# Altium PCB DPPXHK.PcbDoc (part 2 of 3)
Units mm, origin at the board's own origin, x right, y up, seen from the top; angles counter-clockwise.
Board outline 90 x 49 mm, 4 copper layers (Top Layer, ground_plane, source, Bottom Layer), stack 0.778 mm thick; 169 components, 237 nets, 996 pads, 341 vias.
Unrouted connection lines stored in the file: 220.
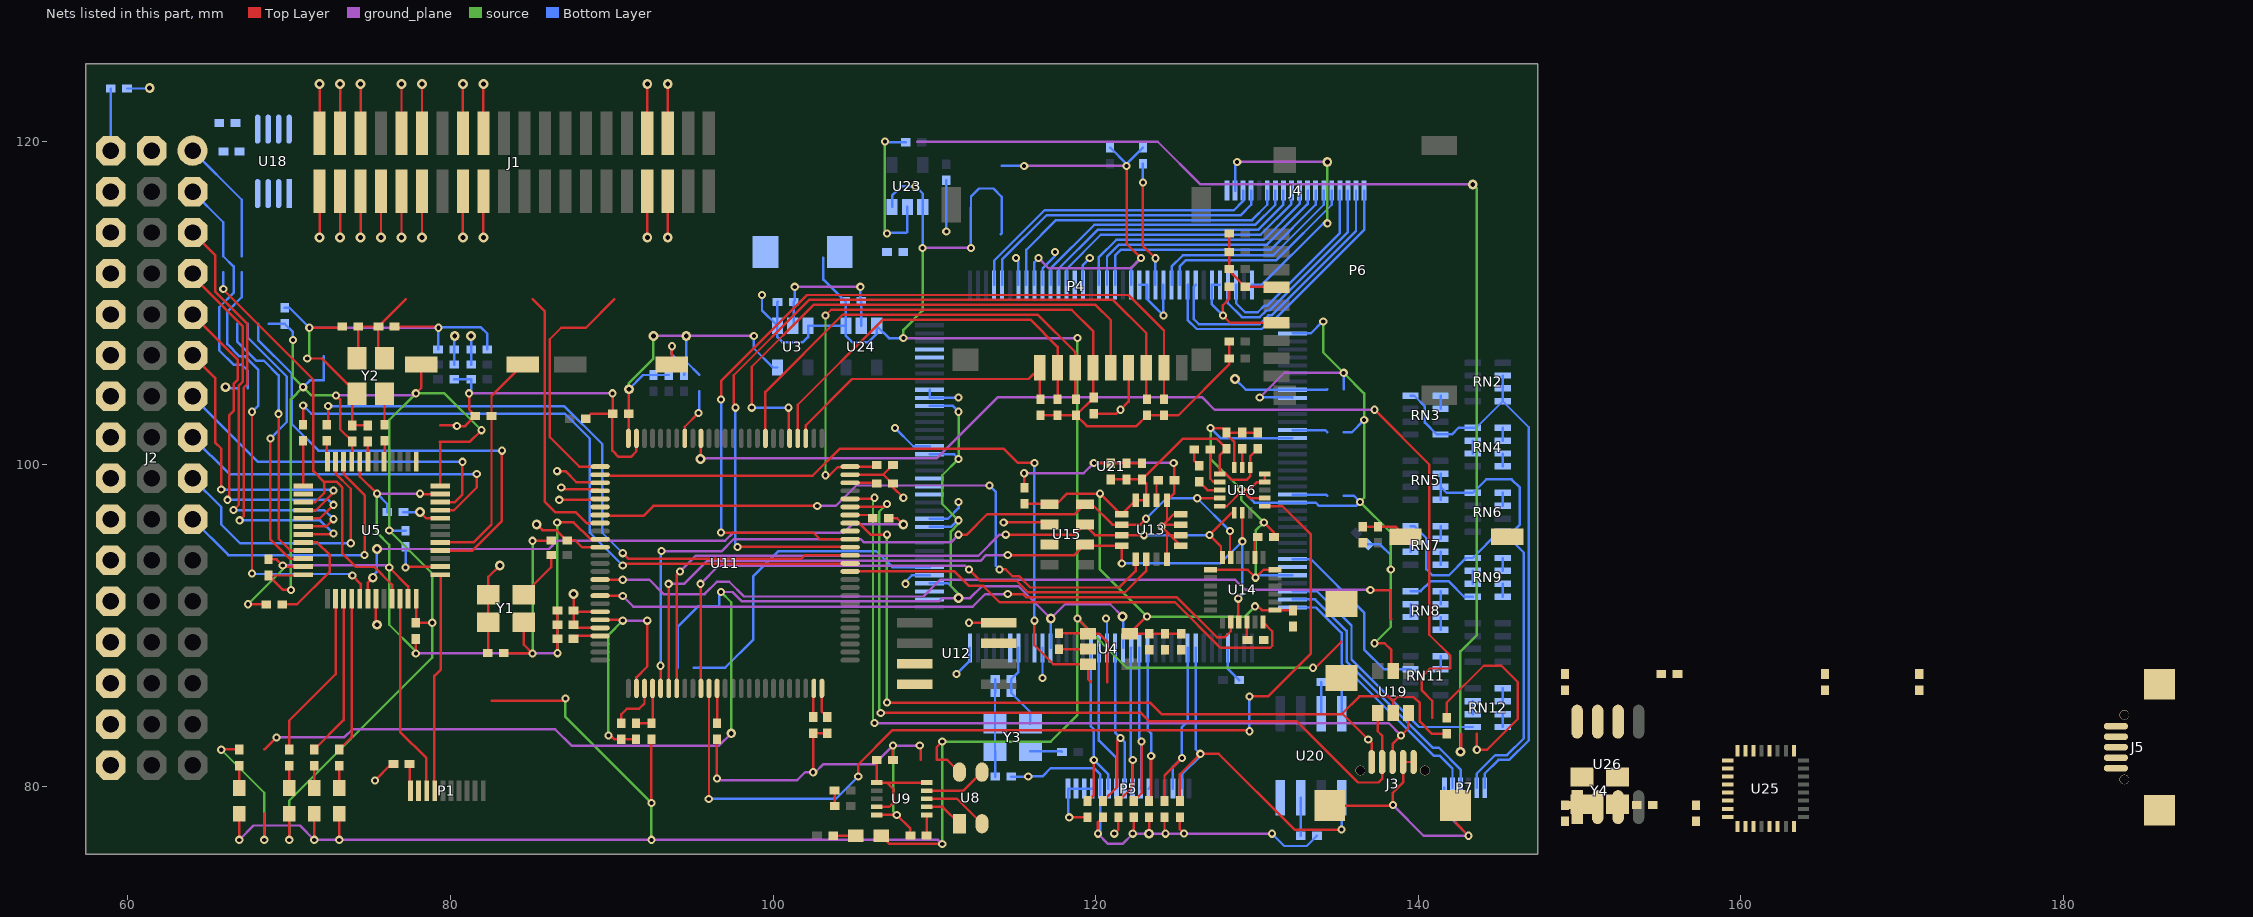
[diagram p4: the nets of this part, all layers, seen from the top]

## Via types
v1: diameter 0.508, hole 0.254, Top Layer to Bottom Layer, 256 vias
v2: diameter 0.61, hole 0.305, Top Layer to Bottom Layer, 81 vias
v3: diameter 1, hole 1, Top Layer to Bottom Layer, 4 vias

## Nets (pads, with @x,y where several pads share a name; then routed paths per layer and width w, separated by ;. In a path a pad name is that pad's centre, name@x,y a point inside that pad or via, vN(x,y) a via of type N, cw(c..) or ccw(c..) an arc to the next point about the centre after c; other vN are vias at no path point) (continued)
GND: C5.2 C6.1 C7.1 C8.2 C9.1 C10.1 C13.2 C14.2 C16.2 C17.2 C18.1 C26.1 C30.2 C31.2 C32.2 C33.2 C34.2 C35.2 C36.2 C37.1 C38.1 C39.1 C40.1 C41.2 C42.2 C43.1 C44.1 C45.2 C46.1 C48.1 C49.1 C50.1 C51.1 C52.1 C53.1 C54.1 C55.1 C56.1 C57.1 C58.1 C60.1 C64.2 C65.1 C66.1 C67.2 C71.2 C72.1 C73.1 C74.2 C75.1 C76.1 C77.1 C78.1 C79.2 J1.33 J1.34 J1.35 J2.3 J2.6 J2.9 J2.12 J2.15 J2.18 J2.21 J2.24 J2.27 J2.30 J2.33 J2.36 J2.39 J2.42 J2.45 J2.48 J3.4 J3.5 J3.6 J3.7 J3.8 J3.9 J4.2 J5.5 J5.6 J5.7 J5.8 J5.9 K1.2 P1.2 P4.6 P5.13 P5.14 P5.15 P5.16 P6.6 P7.6 R5.1 R6.1 R14.2 R18.1 R19.1 R22.1 R23.1 R35.1 R36.1 R40.1 R41.1 R68.1 R70.1 Rs1.1 S2.2 U3.2 U4.2 U5.8 U5.23 U5.35 U5.47 U9.5 U11.10 U11.20 U11.27 U11.74 U11.99 U12.4 U13.8 U13.9 U13.10 U13.11 U13.12 U13.13 U14.1 U14.18 U15.2 U15.3 U16.5 U16.10 U16.12 U16.13 U16.16 U18.1 U18.4 U18.7 U19.2 U20.4 U21.4 U21.19 U21.27 U21.30 U21.36 U21.41 U21.48 U21.57 U21.63 U21.64 U21.79 U21.82 U21.86 U21.87 U21.94 U21.95 U21.97 U21.103 U21.104 U21.108 U21.110 U21.118 U21.123 U21.131 U21.140 U23.2 U24.2 U25.1 U25.2 U25.9 U26.3 Y1.2 Y2.2 Y3.2 Y4.2 | length 438.6
  Top Layer w0.152: v1(65.786,82.296) 65.801,82.311 R22.1@66.903,82.311 ; v1(67.437,91.313) R18.1@68.58,91.313 ; v1(68.453,76.708) 68.453,78.321 ; C17.2@68.707,94.099 69.223,94.099 v1(69.596,93.726) 69.675,93.647 U5.23@70.875,93.647 ; v1(71.12,106.553) 72.032,106.553 Y2.2@74.207,104.378 73.914,104.085 C13.2@73.914,102.403 C18.1@74.867,102.403 ; v1(71.247,108.458) 73.112,108.458 73.239,108.585 C5.2@73.287,108.537 ; U5.8@74.375,100.147 74.375,99.234 v1(75.438,98.171) ; v1(75.311,80.391) 75.311,80.394 76.326,81.408 C34.2@76.462,81.408 ; v1(76.2,93.599) 77.375,92.424 U5.35@77.375,91.647 ; C35.2@76.531,108.537 79.169,108.537 v1(79.248,108.458) ; v1(77.851,88.265) 77.851,88.908 77.978,89.035 C14.2@77.851,89.162 ; v1(78.105,98.171) 78.129,98.147 U5.47@79.375,98.147 ; 79.375,102.403 80.35,102.403 v1(80.391,102.362) 80.907,102.362 R5.1@81.542,102.997 81.153,103.386 v1(81.153,104.394) ; C38.1@83.304,88.3 83.339,88.265 v1(85.09,88.265) 84.539,88.816 Y1.2@84.539,90.209 ; v1(85.09,95.25) 86.221,95.25 C7.1@86.241,95.27 ; v1(86.614,96.393) 87.63,96.393 88.673,95.35 U11.10@89.278,95.35 ; v1(86.63,88.281) C39.1@86.63,89.177 C32.2@86.63,90.043 C40.1@86.63,90.932 ; C44.1@88.384,102.811 88.697,103.124 C43.1@90.051,103.124 ; U11.20@89.278,90.35 90.625,90.35 v1(90.678,90.297) ; v1(89.789,83.185) 89.916,83.185 90.162,82.939 C33.2@90.594,82.939 R14.2@91.503,82.939 ; v1(90.043,104.394) 90.051,104.386 C43.1@90.051,103.124 ; U11.27@91.528,86.1 91.528,86.782 92.202,87.456 v1(92.202,90.297) ; U11.99@91.528,101.6 91.528,100.799 91.186,100.457 90.424,100.457 90.043,100.838 90.043,103.116 C43.1@90.051,103.124 ; v2(92.202,114.046) J1.33@92.202,116.923 ; J1.34@92.202,120.523 v2(92.202,123.571) ; v2(93.472,114.046) J1.35@93.472,116.923 ; S2.2@93.726,106.172 v1(93.726,107.315) ; v1(96.52,80.518) R35.1@96.52,82.947 ; v1(102.489,80.899) C42.2@102.489,83.32 C37.1@103.355,83.32 ; U11.74@104.778,99.35 106.835,99.35 ; U9.5@106.426,78.256 v1(107.672,78.256) 108.518,77.41 R23.1@108.518,76.97 ; C36.2@107.434,81.661 107.434,82.542 v1(107.442,82.55) ; C31.2@107.434,99.949 106.835,99.35 ; v1(108.077,97.917) 107.434,98.56 C41.2@107.434,98.806 107.379,98.806 106.835,99.35 ; v1(109.093,82.55) 109.151,82.492 109.151,81.661 ; v1(112.141,90.17) U12.4@113.979,90.17 ; v1(114.3,96.393) 117.009,96.393 U15.2@117.136,96.266 ; v1(115.57,99.441) 115.57,98.562 C50.1@115.588,98.544 ; C9.1@117.729,88.527 119.51,88.527 U4.2@119.528,88.545 ; v1(118.364,78.105) R70.1@119.507,78.105 ; v1(119.888,100.076) 119.908,100.056 C58.1@120.94,100.056 C56.1@121.907,100.056 C55.1@122.875,100.056 ; C30.2@119.888,103.132 121.293,103.132 v1(121.539,103.378) 122.041,103.88 P4.6@122.041,105.978 ; v1(121.158,77.089) 121.412,77.343 R68.1@121.412,78.113 ; U13.8@124.426,94.103 124.426,95.792 ; v1(124.841,100.076) 124.887,100.03 C52.1@124.887,99.011 124.887,98.219 U13.13@124.426,97.758 124.426,96.486 ; U13.9@125.276,94.953 125.265,94.953 124.615,95.603 ; U13.10@125.276,95.603 124.615,95.603 ; U13.11@125.276,96.253 v1@124.193,96.253 ; U13.12@125.276,96.903 124.843,96.903 124.426,96.486 ; U14.1@127.127,93.456 129.429,93.456 v1(129.921,92.964) 130.413,93.456 U14.18@131.127,93.456 ; v1(127.127,102.235) 127.848,102.235 C54.1@128.122,101.961 ; U16.5@127.692,97.393 128.127,97.393 129.032,98.298 v1(129.032,98.425) ; C26.1@128.278,110.998 128.278,110.244 127.889,109.855 v1(127.889,109.22) 128.345,108.764 P6.6@131.221,108.764 ; U16.16@128.592,99.793 128.605,99.806 128.605,101.369 128.122,101.853 C54.1@128.122,101.961 ; C57.1@130.056,101.961 C60.1@129.089,101.961 C54.1@128.122,101.961 ; v1(130.429,96.393) 131.056,95.766 C51.1@131.056,95.487 ; U16.10@130.492,97.893 129.564,97.893 v1(129.032,98.425) ; U16.13@130.492,99.393 U16.12@130.492,98.893 130.008,98.893 129.54,98.425 v1(129.032,98.425) ; J3.6@134.515,78.834 138.397,78.834 v1(138.43,78.867) 138.43,79.629 139.065,80.264 J3.4@139.065,81.534 J3.5@139.715,81.534 ; v1(137.287,88.9) 137.916,88.9 138.338,88.478 138.338,87.28 U19.2@138.446,87.172 ; C64.2@141.774,84.279 141.774,85.213 144.064,87.503 145.161,87.503 146.177,86.487 146.177,84.201 144.273,82.297 v1(143.637,82.296) 143.636,83.279 ; J3.7@142.315,78.834 142.315,77.776 v1(143.129,76.962) ; v1@124.193,96.253 v1(124.079,96.139) 124.426,95.792 ; v1@124.193,96.253 124.426,96.486 ; 124.426,95.792 124.615,95.603
  ground_plane w0.152: v1(69.596,93.726) 76.073,93.726 v1(76.2,93.599) ; v1(71.247,108.458) v1(79.248,108.458) ; v1(75.438,98.171) v1(78.105,98.171) ; v1(77.851,88.265) v1(85.09,88.265) 85.106,88.281 v1(86.63,88.281) ; v1(81.153,104.394) v1(90.043,104.394) ; v1(90.678,90.297) v1(92.202,90.297) ; v1(96.52,80.518) 96.622,80.416 101.498,80.416 101.981,80.899 v1(102.489,80.899) 102.616,80.899 103.124,81.407 106.299,81.407 v1(107.442,82.55) v1(109.093,82.55) ; v1(101.346,110.998) v1(105.41,110.998) ; v1@106.934,114.427 v1(107.061,114.3) ; v1(115.57,99.441) 119.253,99.441 v1(119.888,100.076) v1(124.841,100.076) ; v1(128.778,118.745) v2(134.366,118.745) ; v1(130.175,104.14) 131.699,105.664 v1(135.382,105.664) ; v1(138.43,78.867) 140.335,76.962 v1(143.129,76.962)
  source w0.152: v1(65.786,82.296) 68.453,79.629 v1(68.453,76.708) ; v1(67.437,91.313) 69.596,93.472 v1(69.596,93.726) ; v1(71.12,106.553) 71.247,106.68 v1(71.247,108.458) ; v1(75.438,98.171) 75.438,95.758 76.2,94.996 v1(76.2,93.599) 76.2,90.043 77.851,88.392 v1(77.851,88.265) ; v1(85.09,88.265) v1(85.09,95.25) ; v1(86.614,96.393) 86.63,96.377 v1(86.63,88.281) ; v1(89.789,83.185) 89.789,89.408 v1(90.678,90.297) ; v1@106.934,114.427 v1(106.934,120.015) ; v1(107.442,82.55) 107.442,78.486 v1(107.672,78.256) ; v1(127.127,102.235) 127.127,100.33 v1(129.032,98.425) 129.032,97.79 v1(130.429,96.393) 129.921,95.885 v1(129.921,92.964) ; v1(134.112,108.839) 134.112,106.934 v1(135.382,105.664) 136.652,104.394 v1(136.652,102.743) 136.652,97.917 v1(136.398,97.663) 138.303,95.758 v1(138.303,93.472) 138.303,89.916 v1(137.287,88.9) ; v1(134.366,114.935) v2(134.366,118.745)
  Bottom Layer w0.152: J2.3@58.928,119.443 58.944,119.459 58.944,122.428 C6.1@58.944,123.294 ; v2(66.04,104.775) 66.103,104.712 66.787,104.712 ; C16.2@69.723,109.698 70.007,109.698 v1(71.247,108.458) ; v1(75.438,98.171) 76.081,97.528 R19.1@76.081,97.028 ; R41.1@79.227,107.125 79.248,107.145 v1(79.248,108.458) 79.273,108.483 81.89,108.483 82.288,108.085 R40.1@82.288,107.125 ; C48.1@80.227,105.263 C46.1@81.288,105.263 81.288,104.529 v1(81.153,104.394) ; v1(93.726,107.315) 93.726,106.807 94.485,106.048 R36.1@94.485,105.529 ; U3.2@101.219,108.585 101.277,108.643 C72.1@101.277,110.059 101.346,110.128 v1(101.346,110.998) ; v1(105.41,110.998) 105.41,110.162 C75.1@105.463,110.109 105.463,108.593 U24.2@105.471,108.585 ; v1(106.934,120.015) 106.982,119.967 C73.1@108.225,119.967 ; v1(107.061,114.3) 107.111,114.35 108.273,114.35 108.331,114.408 U23.2@108.331,115.951 ; v1(107.569,102.235) 108.689,101.115 U21.57@109.707,101.115 ; v1(108.204,92.583) 108.204,92.71 108.609,93.115 U21.41@109.707,93.115 ; U21.48@109.707,96.615 110.842,96.615 111.506,97.279 v1(111.506,97.663) ; U21.64@109.707,104.615 U21.63@109.707,104.115 111.481,104.115 v1(111.506,104.14) ; v1(110.744,114.427) C71.2@110.744,117.602 ; v1(111.379,86.995) 112.207,87.823 U21.36@112.207,88.615 ; v1(115.062,112.776) 115.207,112.631 U21.79@115.207,111.115 ; U21.30@115.207,88.615 115.207,87.118 C65.1@114.768,86.679 C66.1@114.768,85.813 115.96,84.621 Y3.2@115.96,83.904 ; U21.27@116.707,88.615 116.707,86.747 v1(116.713,86.741) ; U21.82@116.707,111.115 116.707,112.135 117.475,112.903 v1(117.475,113.157) ; v1(118.364,78.105) 118.293,78.176 P5.16@118.293,79.883 P5.15@118.793,79.883 P5.14@119.293,79.883 P5.13@119.793,79.883 ; U21.86@118.707,111.115 U21.87@119.207,111.115 119.207,112.349 v1(119.634,112.776) ; v1(120.65,90.424) 120.707,90.367 U21.19@120.707,88.615 ; U21.94@122.707,111.115 U21.95@123.207,111.115 123.207,110.219 v1(124.206,109.22) v1(124.206,109.22) U21.97@124.207,111.115 ; v1(127.127,102.235) 127.747,101.615 U21.123@132.207,101.615 ; U21.104@127.707,111.115 U21.103@127.207,111.115 127.207,109.902 v1(127.889,109.22) ; U21.4@128.207,88.615 128.207,87.304 C76.1@128.897,86.614 ; J4.2@128.644,116.967 128.644,118.611 v1(128.778,118.745) ; v1(129.032,98.425) 129.842,97.615 U21.131@132.207,97.615 133.652,97.615 133.858,97.409 136.144,97.409 v1(136.398,97.663) 136.017,98.044 135.374,98.044 ; U21.108@129.707,111.115 130.292,111.115 134.112,114.935 v1(134.366,114.935) ; v1(129.921,92.964) 130.072,93.115 U21.140@132.207,93.115 ; v1(130.175,104.14) 132.182,104.14 U21.118@132.207,104.115 ; U21.110@132.207,108.115 133.342,108.115 134.066,108.839 v1(134.112,108.839) ; 135.374,101.981 135.89,101.981 v1(136.652,102.743) ; 135.374,104.648 135.374,105.656 v1(135.382,105.664) ; C74.2@136.879,95.023 137.641,95.023 138.303,94.361 v1(138.303,93.472) ; P7.6@141.629,79.935 141.629,78.462 v1(143.129,76.962)
GPIO_EXT_1: J1.7 U11.8 | length 19.7
  Top Layer w0.152: v2(75.692,114.046) J1.7@75.692,116.923 ; 85.09,110.236 85.852,109.474 85.852,97.663 86.487,97.028 87.757,97.028 88.435,96.35 U11.8@89.278,96.35
GREEN: P7.2 RN5.2 RN5.3 RN5.4 RN6.4 RN6.8 RN7.8 RN9.8 | length 37.8
  Bottom Layer w0.152: RN7.8@139.534,96.165 139.757,96.165 140.503,95.419 140.503,93.498 140.884,93.117 141.9,93.117 142.967,94.184 RN9.8@143.383,94.184 RN6.4@145.022,95.823 ; RN5.4@141.392,97.804 RN5.3@141.392,98.604 ; RN5.2@141.392,99.404 RN5.3@141.392,98.604 ; P7.2@143.629,79.935 143.629,80.817 144.777,81.966 145.516,81.966 146.548,82.998 146.548,94.515 RN6.4@145.241,95.823 145.861,95.823 146.304,96.266 146.304,98.552 145.796,99.06 144.22,99.06 RN6.8@143.383,98.223 141.773,98.223 RN5.3@141.392,98.604
GYRO_CS: U11.7 U13.5 U21.28 | length 40.4
  Top Layer w0.152: U11.7@89.278,96.85 89.329,96.799 91.973,96.799 92.583,97.409 v1(102.743,97.409) ; v1(114.046,93.472) 114.427,93.472 114.833,93.066 115.238,93.066 115.949,92.354 121.46,92.354 122.476,93.371 U13.5@122.476,94.103
  ground_plane w0.152: v1(102.743,97.409) 103.886,97.409 105.156,98.679 v1(113.411,98.679)
  Bottom Layer w0.152: v1(113.411,98.679) 113.817,98.273 113.817,93.701 v1(114.046,93.472)
GYRO_DRDY: U11.35 U13.6 U21.31 | length 36.5
  Top Layer w0.152: U11.35@95.528,86.1 v1@95.528,92.559 ; v1(112.141,93.472) 112.852,92.761 115.111,92.761 115.823,92.05 121.805,92.05 123.126,93.371 U13.6@123.126,94.103
  ground_plane w0.152: v1(95.504,92.583) 96.622,93.701 111.912,93.701 v1(112.141,93.472)
IO_BOOT0: R19.2 U5.44 | length 2.5
  Top Layer w0.152: v2(78.105,97.028) 78.486,96.647 U5.44@79.375,96.647
  Bottom Layer w0.152: R19.2@77.081,97.028 v2(78.105,97.028)
IO_CH1: J2.28 U5.10 | length 17.9
  Top Layer w0.152: U5.10@73.375,100.147 73.375,99.382 74.676,98.081 v1(74.676,94.361)
  Bottom Layer w0.152: J2.28@64.008,96.583 66.23,94.361 v1(74.676,94.361)
IO_CH2: J2.25 U5.11 | length 17.5
  Top Layer w0.152: U5.11@72.875,100.147 72.875,99.417 73.812,98.479 v1(73.812,95.098)
  Bottom Layer w0.152: J2.25@64.008,99.123 65.786,97.345 65.786,96.266 66.954,95.098 v1(73.812,95.098)
IO_CH3: J2.22 U5.45 | length 22.2
  Top Layer w0.152: U5.45@79.375,97.147 80.209,97.147 81.627,98.566 v1(81.627,99.385)
  Bottom Layer w0.152: J2.22@64.008,101.663 66.286,99.385 v1(81.627,99.385)
IO_CH4: J2.19 U5.46 | length 22
  Top Layer w0.152: U5.46@79.375,97.647 80.27,97.647 80.738,98.115 v1(80.738,100.147)
  Bottom Layer w0.152: J2.19@64.008,104.203 68.064,100.147 v1(80.738,100.147)
IO_CH5: J2.16 U5.16 | length 18.5
  Top Layer w0.152: J2.16@64.008,106.743 65.405,105.346 65.405,101.346 65.786,100.965 v1(65.786,98.425) ; U5.16@70.875,97.147 71.65,97.147 72.737,98.234 v1(72.737,98.369)
  Bottom Layer w0.152: v1(65.786,98.425) 72.681,98.425 v1(72.737,98.369)
IO_CH6: J2.13 U5.17 | length 21.8
  Top Layer w0.152: J2.13@64.008,109.283 66.802,106.489 66.802,105.225 66.573,104.996 66.573,103.327 66.269,103.022 66.269,97.892 v1(66.167,97.79) ; U5.17@70.875,96.647 71.904,96.647 v1(72.737,97.48)
  Bottom Layer w0.152: v1(66.167,97.79) 72.427,97.79 v1(72.737,97.48)
IO_CH7: J2.10 U5.18 | length 24.7
  Top Layer w0.152: J2.10@64.008,111.823 64.008,111.662 67.107,108.564 67.107,105.098 66.878,104.87 66.878,97.485 v1(66.548,97.155) ; U5.18@70.875,96.147 72.293,96.147 v1(72.737,96.591)
  Bottom Layer w0.152: v1(66.548,97.155) 72.173,97.155 v1(72.737,96.591)
IO_CH8: J2.7 U5.19 | length 27.5
  Top Layer w0.152: J2.7@64.008,114.363 65.405,112.966 65.405,110.697 67.412,108.69 67.412,104.972 67.183,104.743 67.183,96.774 v1(66.929,96.52) ; U5.19@70.875,95.647 72.682,95.647 v1(72.737,95.702)
  Bottom Layer w0.152: v1(66.929,96.52) 71.919,96.52 v1(72.737,95.702)
IO_CLK_24M: R34.2 U5.5 | length 1.3
  Top Layer w0.152: U5.5@75.875,100.147 75.915,100.187 R34.2@75.915,101.451
IO_LED_AMBER: R24.1 U5.28 | length 9.7
  Top Layer w0.152: R24.1@73.102,82.311 73.849,83.058 73.875,83.058 U5.28@73.875,91.647
IO_LED_BLUE: R25.1 U5.27 | length 10.1
  Top Layer w0.152: R25.1@71.552,82.311 73.375,84.134 U5.27@73.375,91.647
IO_LED_SAFETY: R8.1 U5.26 | length 10.5
  Top Layer w0.152: R8.1@70.003,82.311 70.003,84.1 72.875,86.972 U5.26@72.875,91.647
IO_RESET: C18.2 U5.7 | length 1.3
  Top Layer w0.152: C18.2@74.867,101.403 74.867,100.155 U5.7@74.875,100.147
IO_SWCLK: P1.4 U5.37 | length 13.6
  Top Layer w0.152: P1.4@79.002,79.756 79.002,86.876 79.4,87.274 79.4,93.122 U5.37@79.375,93.147
IO_SWDIO: P1.3 U5.34 | length 12.6
  Top Layer w0.152: U5.34@76.875,91.647 76.875,83.399 78.502,81.772 P1.3@78.502,79.756
IO_USART1_RX: J1.16 U5.31 | length 4.7
  Top Layer w0.152: U5.31@75.375,91.647 75.375,90.106 v2(75.438,90.043) ; J1.16@80.772,120.523 v2(80.772,123.571)
IO_USART1_TX: J1.15 R31.1 U5.30 | length 40.5
  Top Layer w0.152: U5.30@74.875,91.647 74.875,92.655 v2(75.184,92.964) ; v2(80.772,114.046) J1.15@80.772,116.923 ; R31.1@107.18,96.647 107.696,96.647 v2(108.077,96.266)
  ground_plane w0.152: v2(75.438,94.742) 86.106,94.742 86.614,95.25 97.028,95.25 97.536,95.758 104.394,95.758 104.902,96.266 v2(108.077,96.266)
  Bottom Layer w0.152: v2(75.184,92.964) 75.184,93.091 75.438,93.345 v2(75.438,94.742)
IO_VDD_3V3: C5.1 C7.2 C13.1 C14.1 C16.1 C17.1 C26.2 C30.1 C31.1 C32.1 C33.1 C34.1 C35.1 C36.1 C37.2 C38.2 C39.2 C40.2 C43.2 DS1.1 J1.1 J1.2 J1.9 J4.1 L2.2 P1.1 P4.4 P5.12 P6.4 R3.1 R4.1 R17.2 R50.2 R51.2 R52.2 R53.2 R54.2 R55.2 R56.2 R57.2 R58.1 R62.1 R64.1 R65.1 R66.1 R67.1 R69.1 R71.1 R72.1 R74.2 R75.2 R76.2 R77.2 R78.2 S1.2 U3.5 U5.1 U5.9 U5.24 U5.36 U5.48 U9.1 U9.4 U9.10 U11.6 U11.11 U11.19 U11.21 U11.22 U11.28 U11.50 U11.75 U11.100 U12.3 U12.7 U12.8 U18.8 U20.8 U21.17 U21.26 U21.40 U21.47 U21.56 U21.62 U21.81 U21.93 U21.117 U21.122 U21.130 U21.139 U26.7 Y1.1 Y1.4 Y2.1 Y2.4 | length 382
  Top Layer w0.152: 68.453,82.311 68.468,82.311 v1(69.215,83.058) ; v1(70.003,76.708) DS1.1@70.003,78.321 ; v1(70.104,92.202) 69.604,92.202 C17.1@68.707,93.099 70.827,93.099 U5.24@70.875,93.147 ; v2(71.882,114.046) J1.1@71.882,116.923 ; J1.2@71.882,120.523 v2(71.882,123.571) ; v1(72.898,104.267) 73.152,104.013 73.152,102.165 C13.1@73.914,101.403 73.914,100.236 73.825,100.147 U5.9@73.875,100.147 ; Y2.1@74.207,106.578 74.287,106.658 C5.1@74.287,108.537 75.451,108.537 C35.1@75.531,108.458 ; Y2.4@75.907,106.578 75.531,106.954 C35.1@75.531,108.458 ; v2(76.962,114.046) J1.9@76.962,116.923 ; 77.229,110.236 C35.1@75.531,108.537 C35.1@75.531,108.458 ; C34.1@77.462,81.408 77.462,79.796 P1.1@77.502,79.756 ; v1(77.851,104.394) 78.186,104.729 S1.2@78.186,106.172 ; U5.36@77.875,91.647 77.875,90.186 C14.1@77.851,90.162 78.859,90.162 v1(78.867,90.17) ; 79.318,101.403 79.375,101.403 ; U5.48@79.375,98.647 79.375,101.403 ; v1(81.915,102.108) 81.21,101.403 79.375,101.403 ; C38.2@82.304,88.3 82.339,88.335 Y1.1@82.339,90.209 Y1.4@82.339,91.909 82.339,93.007 v2(83.058,93.726) ; v2(85.344,96.266) 85.7,95.91 86.541,95.91 87.181,95.27 C7.2@87.241,95.27 87.737,95.27 88.157,94.85 U11.11@89.278,94.85 ; C39.2@87.63,89.177 87.803,89.35 U11.22@89.278,89.35 ; v2(87.63,91.948) C40.2@87.63,90.932 C40.2@87.712,90.85 ; U11.21@89.278,89.85 87.823,89.85 C32.1@87.63,90.043 87.63,90.768 C40.2@87.712,90.85 ; U11.19@89.278,90.85 C40.2@87.712,90.85 ; C33.1@90.594,83.939 90.594,84.498 90.932,84.836 91.694,84.836 92.028,85.17 U11.28@92.028,86.1 ; U11.100@91.028,101.6 91.051,101.623 C43.2@91.051,103.124 91.059,103.132 v2(91.059,104.648) ; U11.50@103.028,86.1 103.028,84.647 C37.2@103.355,84.32 ; v1(103.251,99.314) 103.505,99.314 104.013,99.822 U11.75@104.778,99.822 ; v1(103.251,109.22) 103.607,109.576 118.516,109.576 119.841,108.251 P4.4@119.841,105.978 119.841,104.179 C30.1@119.888,104.132 ; R51.2@103.811,79.764 103.811,78.819 R50.2@103.819,78.811 ; U11.75@104.778,99.85 106.335,99.85 C31.1@106.434,99.949 ; C36.1@106.418,81.661 106.418,80.264 U9.1@106.426,80.256 107.061,80.256 ; U9.4@106.426,78.756 107.204,78.756 107.442,78.994 107.442,79.875 107.061,80.256 ; U9.10@109.526,80.256 107.061,80.256 ; R56.2@116.594,103.035 R55.2@117.648,103.035 R54.2@118.791,103.035 ; C30.1@119.888,104.132 R54.2@118.791,103.035 ; v1(120.142,77.089) 120.142,77.795 R69.1@120.46,78.113 ; v1(121.92,118.491) 121.92,113.665 v1(122.809,112.776) ; v1(122.301,77.089) 122.365,77.153 R67.1@122.365,78.113 ; v2(123.317,77.089) R66.1@123.318,78.113 ; R65.1@124.27,78.113 124.27,77.287 124.333,77.224 v1(124.333,77.089) ; R64.1@125.223,78.113 125.223,77.36 v1(125.485,77.098) ; R75.2@128.278,107.607 R74.2@128.278,106.553 128.278,106.18 125.133,103.035 R52.2@124.252,103.035 R53.2@123.198,103.035 122.525,102.362 119.464,102.362 R54.2@118.791,103.035 ; R78.2@128.278,114.3 R77.2@128.278,113.157 R76.2@128.278,112.103 128.278,111.998 C26.2@129.278,110.998 131.187,110.998 P6.4@131.221,110.964
  ground_plane w0.152: v1(69.215,83.058) 73.406,83.058 73.914,83.566 86.487,83.566 87.503,82.55 96.647,82.55 v2(97.409,83.312) ; v1(72.898,104.267) v1@77.724,104.267 ; v2(92.583,107.95) v2(94.615,107.95) v1(98.806,107.95) ; v1(96.774,92.075) 97.486,92.075 98.07,91.491 110.287,91.491 110.49,91.694 v2(111.506,91.694) 112.218,91.694 112.955,92.431 115.214,92.431 v2(117.221,90.424) 118.11,91.313 120.904,91.313 v2(121.666,90.551) ; v1(115.57,118.491) v1(121.92,118.491) ; v1(116.459,112.776) 117.094,112.141 122.174,112.141 v1(122.809,112.776) ; v1(120.142,77.089) 120.777,76.454 121.666,76.454 v1(122.301,77.089) v1(124.333,77.089) 125.476,77.089 v1(125.485,77.098) 125.494,77.089 v1(130.937,77.089)
  source w0.152: v1(70.003,76.708) 70.003,79.147 78.867,88.011 v1(78.867,90.17) 78.867,93.218 v1(76.2,95.885) 76.2,102.743 v1(77.851,104.394) 79.629,104.394 v1(81.915,102.108) ; v1(70.104,92.202) 70.104,104.013 v1(70.866,104.775) ; v1(70.231,107.696) 70.231,105.41 v1(70.866,104.775) ; v1(72.898,104.267) 71.374,104.267 v1(70.866,104.775) ; v2(91.059,104.648) 91.059,105.029 92.583,106.553 v2(92.583,107.95) ; v1(96.774,92.075) 97.409,91.44 v2(97.409,83.312) ; v1(103.251,99.314) v1(103.251,109.22) ; v2(111.506,91.694) 111.506,91.948 111.023,92.431 111.023,95.831 111.506,96.313 v1(111.506,96.52) 110.49,97.536 110.49,99.314 v1(111.506,100.33) v1(111.506,103.251)
  Bottom Layer w0.152: 68.737,108.712 69.709,108.712 C16.1@69.723,108.698 70.231,108.19 v1(70.231,107.696) ; v1(70.866,104.775) 71.285,105.194 72.136,105.194 ; 72.136,105.195 72.136,106.68 ; v1(76.2,95.885) 76.208,95.877 R17.2@77.216,95.877 ; v2(91.059,104.648) 91.94,105.529 R4.1@92.58,105.529 R3.1@93.532,105.529 ; 94.083,87.376 94.083,89.916 95.353,91.186 96.651,91.186 96.651,91.952 v1(96.774,92.075) ; v2(94.615,107.95) 94.615,106.352 95.438,105.529 ; v1(98.806,107.95) 98.806,107.188 99.999,105.995 U3.5@100.269,105.995 ; U21.40@109.707,92.615 110.839,92.615 111.506,91.948 v2(111.506,91.694) ; U21.47@109.707,96.115 111.022,96.115 111.427,96.52 v1(111.506,96.52) ; U21.56@109.707,100.615 111.221,100.615 v1(111.506,100.33) ; U21.62@109.728,103.632 111.125,103.632 v1(111.506,103.251) ; 114.173,118.491 v1(115.57,118.491) ; L2.2@114.768,80.626 115.805,80.626 v1(115.824,80.645) 116.713,80.645 117.221,81.153 119.888,81.153 120.293,80.748 P5.12@120.293,79.883 120.293,77.24 v1(120.142,77.089) ; U21.81@116.207,111.115 116.207,112.524 v1(116.459,112.776) ; U21.26@117.207,88.615 117.207,90.41 v2(117.221,90.424) ; R71.1@120.904,119.626 v1@121.92,118.61 ; v2(121.666,90.551) 121.707,90.51 U21.17@121.707,88.615 ; v1(121.92,118.491) v1@121.92,118.61 ; U21.93@122.207,111.115 122.207,112.174 v1(122.809,112.776) ; R72.1@122.936,119.626 v1@121.92,118.61 ; v2(128.651,105.283) 129.311,104.623 132.199,104.623 U21.117@132.207,104.615 134.341,104.615 134.374,104.648 ; v1(130.937,77.089) 131.699,76.327 133.088,76.327 R58.1@133.723,76.962 ; U21.130@132.207,98.115 134.303,98.115 134.374,98.044 ; U21.122@132.207,102.115 134.24,102.115 134.374,101.981 ; R57.2@134.993,86.487 135.255,86.225 U20.8@135.255,84.515
IO_VDD_SERVO_IN_FAULT: R17.1 U5.38 | length 3.5
  Top Layer w0.152: v1(77.216,93.599) 77.264,93.647 U5.38@79.375,93.647
  Bottom Layer w0.152: v1(77.216,93.599) R17.1@77.216,94.877
MAG_DRDY: U11.36 U16.9 U21.51 | length 60.6
  Top Layer w0.152: v1(96.012,79.248) 96.028,79.264 U11.36@96.028,86.1 ; v1(105.283,80.645) 105.283,81.388 107.406,83.512 129.467,83.512 v1(129.54,83.439) ; v1(129.54,85.598) 130.683,85.598 133.35,88.265 133.35,95.631 131.588,97.393 U16.9@130.492,97.393
  Bottom Layer w0.152: v1(96.012,79.248) 103.886,79.248 v1(105.283,80.645) ; v1(129.54,83.439) v1(129.54,85.598)
MPU_CS: U11.17 U14.8 U21.52 | length 41.5
  Top Layer w0.152: U11.17@89.278,91.85 90.649,91.85 v1(90.678,91.821) ; v1(114.554,91.948) 115.493,91.948 115.696,91.745 125.044,91.745 127.508,89.281 128.016,89.281 128.377,89.642 U14.8@128.377,90.206
  ground_plane w0.152: v1(90.678,91.821) 91.338,91.161 112.37,91.161 113.157,91.948 v1(114.554,91.948)
MPU_DRDY: U11.62 U14.12 U21.53 | length 29.9
  Top Layer w0.152: U11.62@104.778,93.35 111.247,93.35 112.141,92.456 113.03,92.456 114.046,91.44 124.918,91.44 127.748,88.61 130.816,88.61 130.95,88.744 130.95,89.633 U14.12@130.377,90.206
nCE: P5.11 R70.2 U21.21 | length 11.9
  Top Layer w0.152: R70.2@119.507,79.113 119.888,79.494 v1(119.888,81.661)
  Bottom Layer w0.152: U21.21@119.707,88.615 119.707,83.747 119.888,83.566 v1(119.888,81.661) 120.793,80.756 P5.11@120.793,79.883
nCONFIG: P5.6 R66.2 U21.14 | length 11.7
  Top Layer w0.152: R66.2@123.318,79.113 123.444,79.239 v1(123.444,81.915)
  Bottom Layer w0.152: U21.14@123.207,88.615 123.24,88.582 123.24,83.516 123.444,83.312 v1(123.444,81.915) 123.414,81.885 123.414,80.004 P5.6@123.293,79.883
nCSO: P5.2 R64.2 U20.1 U21.8 | length 25.5
  Top Layer w0.152: R64.2@125.223,79.113 125.223,80.773 v1(126.492,82.042) 127.635,82.042 132.334,77.343 v1(135.255,77.343)
  Bottom Layer w0.152: P5.2@125.293,79.883 125.369,79.959 125.369,80.792 126.492,81.915 v1(126.492,82.042) 126.207,82.327 U21.8@126.207,88.615 ; v1(135.255,77.343) U20.1@135.255,79.315
NetC41_1: C41.1 U11.73 | length 1.7
  Top Layer w0.152: U11.73@104.778,98.85 106.39,98.85 C41.1@106.434,98.806
NetC42_1: C42.1 U11.49 | length 1.8
  Top Layer w0.152: C42.1@102.489,84.32 102.489,86.061 U11.49@102.528,86.1
NetC51_2: C51.2 U14.20 | length 1.4
  Top Layer w0.152: U14.20@129.877,94.206 129.877,95.308 C51.2@130.056,95.487
NetC52_2: C52.2 U13.14 | length 1.3
  Top Layer w0.152: U13.14@123.776,97.758 123.776,98.9 C52.2@123.887,99.011
NetC53_2: C53.2 U14.10 | length 1.1
  Top Layer w0.152: U14.10@129.377,90.206 129.377,89.138 C53.2@129.421,89.094
NetC59_1: C59.1 C61.2 | length 1.1
  Top Layer w0.152: C59.1@126.109,100.916 126.109,100.218 C61.2@126.423,99.904
NetC59_2: C59.2 U16.2 | length 2.5
  Top Layer w0.152: C59.2@127.109,100.916 127.109,99.095 127.311,98.893 U16.2@127.692,98.893
NetC60_2: C60.2 U16.15 | length 1.2
  Top Layer w0.152: C60.2@129.089,100.961 129.092,100.958 U16.15@129.092,99.793
NetC61_1: C61.1 U16.3 | length 1.5
  Top Layer w0.152: C61.1@126.423,98.904 126.934,98.393 U16.3@127.692,98.393
NetC65_2: C65.2 C66.2 L2.1 Y3.1 Y3.4 | length 6.1
  Bottom Layer w0.152: L2.1@113.768,80.626 113.768,82.196 Y3.4@113.76,82.204 Y3.1@113.76,83.904 113.76,85.805 C66.2@113.768,85.813 C65.2@113.768,86.679
NetDS1_2: DS1.2 R8.2 | length 1.4
  Top Layer w0.152: DS1.2@70.003,79.921 R8.2@70.003,81.311
NetDS2_2: DS2.2 R21.2 | length 1.4
  Top Layer w0.152: R21.2@103.728,76.962 DS2.2@105.118,76.962
NetDS3_2: DS3.2 R22.2 | length 1.4
  Top Layer w0.152: DS3.2@66.903,79.921 R22.2@66.903,81.311
NetDS4_2: DS4.2 R24.2 | length 1.4
  Top Layer w0.152: DS4.2@73.102,79.921 R24.2@73.102,81.311
NetDS5_2: DS5.2 R25.2 | length 1.4
  Top Layer w0.152: DS5.2@71.552,79.921 R25.2@71.552,81.311
NetJ2_1: J2.1 R48.1 | length 7.8
  Bottom Layer w0.152: J2.1@64.008,119.443 67.056,116.395 67.056,112.895
NetJ2_4: J2.4 R49.2 U18.3 | length 14.6
  Bottom Layer w0.152: J2.4@64.008,116.903 65.913,114.998 65.913,112.895 66.548,112.26 66.548,110.617 65.659,109.728 65.659,107.061 66.548,106.172 67.056,106.172 67.437,105.791 67.437,104.712
NetJ5_4: J5.4 U25.5
NetK1_1: K1.1 R62.2 R63.2 | length 2.9
  Top Layer w0.152: R62.2@136.563,96.131 R63.2@137.516,96.131 138.59,96.131 K1.1@139.217,95.504
NetR1_2: R1.2 U25.4
NetR2_1: R2.1 U25.14
NetR6_2: R6.2 U25.32
NetR15_1: R15.1 U5.12 | length 1.3
  Top Layer w0.152: R15.1@72.327,101.451 72.327,100.195 U5.12@72.375,100.147
NetR16_1: R16.1 U5.13 | length 2.8
  Top Layer w0.152: R16.1@70.866,101.451 70.866,98.656 U5.13@70.875,98.647
NetR18_2: R18.2 U5.20 | length 6.8
  Top Layer w0.152: R18.2@69.596,91.313 70.485,91.313 72.517,93.345 72.517,94.361 71.731,95.147 U5.20@70.875,95.147 U5.20@70.85,95.172
NetR23_2: R23.2 U9.6 | length 1.3
  Top Layer w0.152: R23.2@109.518,76.97 109.518,78.248 U9.6@109.526,78.256
NetR31_2: R31.2 U11.69 | length 1.6
  Top Layer w0.152: U11.69@104.829,96.901 U11.69@104.778,96.85 105.977,96.85 R31.2@106.18,96.647
NetR32_1: R32.1 Y1.3 | length 3.2
  Top Layer w0.152: Y1.3@84.539,91.909 86.241,93.611 R32.1@86.241,94.361
NetR34_1: R34.1 Y2.3 | length 1.9
  Top Layer w0.152: R34.1@75.907,102.459 Y2.3@75.907,104.378
NetR35_2: R35.2 U11.37 | length 2.2
  Top Layer w0.152: R35.2@96.52,83.947 96.528,83.955 U11.37@96.528,86.1
NetR57_1: R57.1 U20.7 | length 2
  Bottom Layer w0.152: U20.7@133.985,84.515 R57.1@133.985,86.487
NetR58_2: R58.2 U20.3 | length 2.4
  Bottom Layer w0.152: U20.3@132.715,79.315 132.715,76.97 R58.2@132.723,76.962
NetR72_2: R72.2 U21.96 | length 7.8
  Top Layer w0.152: v1(122.936,117.475) 122.936,113.538 v1(123.707,112.767)
  Bottom Layer w0.152: v1(122.936,117.475) R72.2@122.936,118.618 ; U21.96@123.707,111.115 v1(123.707,112.767)
NetR73_1: R73.1 Y3.3 | length 2
  Bottom Layer w0.152: Y3.3@115.96,82.204 117.877,82.204 R73.1@117.916,82.165
NetR85_1: R85.1 Y4.3
NetR85_2: R85.2 U25.28
NetRN3_1: RN3.1 RN3.2 | length 0.8
  Bottom Layer w0.152: RN3.2@141.392,103.442 RN3.1@141.392,104.242
NetRN4_1: RN4.1 RN4.2 | length 0.8
  Bottom Layer w0.152: RN4.2@145.241,101.461 RN4.1@145.241,102.261
NetRN4_3: RN4.3 RN4.4 | length 0.8
  Bottom Layer w0.152: RN4.4@145.241,99.861 RN4.3@145.241,100.661
NetRN4_6: RN4.6 RN4.7 | length 0.8
  Bottom Layer w0.152: RN4.6@143.383,100.661 RN4.7@143.383,101.461
NetRN6_1: RN6.1 RN6.2 | length 0.8
  Bottom Layer w0.152: RN6.2@145.241,97.423 RN6.1@145.241,98.223
NetRN7_1: RN7.1 RN7.2 | length 0.8
  Bottom Layer w0.152: RN7.2@141.392,95.365 RN7.1@141.392,96.165
NetRN7_3: RN7.3 RN7.4 | length 0.8
  Bottom Layer w0.152: RN7.4@141.392,93.765 RN7.3@141.392,94.565
NetRN7_6: RN7.6 RN7.7 | length 0.8
  Bottom Layer w0.152: RN7.6@139.534,94.565 RN7.7@139.534,95.365
NetRN8_1: RN8.1 RN8.2 | length 0.8
  Bottom Layer w0.152: RN8.2@141.392,91.326 RN8.1@141.392,92.126
NetRN8_3: RN8.3 RN8.4 | length 0.8
  Bottom Layer w0.152: RN8.4@141.392,89.726 RN8.3@141.392,90.526
NetRN8_6: RN8.6 RN8.7 | length 0.8
  Bottom Layer w0.152: RN8.6@139.534,90.526 RN8.7@139.534,91.326
NetRN8_8: RN8.8 RN9.5 | length 4.5
  Bottom Layer w0.152: RN8.8@139.534,92.126 140.147,92.126 140.757,92.736 141.9,92.736 142.852,91.784 RN9.5@143.383,91.784
NetRN9_1: RN9.1 RN9.2 | length 0.8
  Bottom Layer w0.152: RN9.2@145.241,93.384 RN9.1@145.241,94.184
NetRN9_3: RN9.3 RN9.4 | length 0.8
  Bottom Layer w0.152: RN9.4@145.241,91.784 RN9.3@145.241,92.584
NetRN9_6: RN9.6 RN9.7 | length 0.8
  Bottom Layer w0.152: RN9.6@143.383,92.584 RN9.7@143.383,93.384
NetRN11_1: RN11.1 RN11.2 | length 0.8
  Bottom Layer w0.152: RN11.2@141.392,87.287 RN11.1@141.392,88.087
NetRN12_1: RN12.1 RN12.2 | length 0.8
  Bottom Layer w0.152: RN12.2@145.241,85.306 RN12.1@145.241,86.106
NetRN12_3: RN12.3 RN12.4 | length 0.8
  Bottom Layer w0.152: RN12.4@145.241,83.706 RN12.3@145.241,84.506
NetRN12_6: RN12.6 RN12.7 | length 0.8
  Bottom Layer w0.152: RN12.6@143.383,84.506 RN12.7@143.383,85.306
NetU8_1: U8.1 U9.7 | length 2.5
  Top Layer w0.152: U9.7@109.526,78.756 110.506,78.756 U8.1@111.555,77.707
NetU8_2: U8.2 U9.8 | length 4.1
  Top Layer w0.152: U9.8@109.526,79.256 111.406,79.256 U8.2@112.955,77.707
NetU8_3: U8.3 U9.9 | length 3.9
  Top Layer w0.152: U9.9@109.526,79.756 111.804,79.756 U8.3@112.955,80.907
NetU25_3: U25.3 U26.1
NetU25_10: U25.10 U26.2
nSTATUS: P5.3 R65.2 U21.9 | length 12.2
  Top Layer w0.152: R65.2@124.27,79.113 124.27,80.709 v1(125.349,81.788)
  Bottom Layer w0.152: P5.3@124.793,79.883 124.793,81.232 v1(125.349,81.788) 125.349,83.693 125.707,84.051 U21.9@125.707,88.615
NXT: U21.69 U25.11
OTG_FS_DM: J3.2 U11.70 U19.4 | length 52.7
  Top Layer w0.152: U11.70@104.778,97.35 106.875,97.35 v1(107.061,97.536) ; v1(106.68,84.582) 122.809,84.582 123.317,84.074 132.461,84.074 136.271,80.264 137.541,80.264 137.765,80.488 J3.2@137.765,81.534 137.765,83.17 137.496,83.439 U19.4@137.496,84.582
  source w0.152: v1(106.68,84.582) 106.578,84.684 106.578,97.053 v1(107.061,97.536)
OTG_FS_DP: J3.3 U11.71 U19.6 | length 52
  Top Layer w0.152: U11.71@104.778,97.85 106.232,97.85 v1(106.299,97.917) ; J3.3@138.415,81.534 138.415,82.646 139.396,83.627 U19.6@139.396,84.582
  ground_plane w0.152: v1(106.299,83.947) 138.176,83.947 v1(138.938,83.185)
  source w0.152: v1(106.299,83.947) 106.197,84.049 106.197,97.815 v1(106.299,97.917)
OV_D0: J4.9 U21.85 | length 17.4
  Bottom Layer w0.152: U21.85@118.207,111.115 118.207,112.111 120.32,114.224 130.226,114.224 132.144,116.142 J4.9@132.144,116.967
OV_D1: J4.10 U21.89 | length 16.4
  Bottom Layer w0.152: U21.89@120.207,111.115 120.207,112.841 121.285,113.919 130.429,113.919 132.644,116.134 J4.10@132.644,116.967
OV_D2: J4.11 U21.90 | length 16.4
  Bottom Layer w0.152: U21.90@120.707,111.115 120.707,112.875 121.446,113.614 130.632,113.614 133.144,116.126 J4.11@133.144,116.967
OV_D3: J4.12 U21.91 | length 16.4
  Bottom Layer w0.152: U21.91@121.207,111.115 121.207,112.944 121.572,113.309 130.869,113.309 133.644,116.084 J4.12@133.644,116.967
OV_D4: J4.13 U21.98 | length 13
  Bottom Layer w0.152: U21.98@124.707,111.115 124.707,112.25 125.411,112.954 131.014,112.954 134.144,116.084 J4.13@134.144,116.967
OV_D5: J4.14 U21.99 | length 13
  Bottom Layer w0.152: U21.99@125.207,111.115 125.207,112.25 125.606,112.649 131.209,112.649 134.644,116.084 J4.14@134.644,116.967
OV_D6: J4.15 U21.106 | length 12.5
  Bottom Layer w0.152: U21.106@128.707,111.115 128.707,109.98 129.264,109.423 130.051,109.423 130.462,109.834 130.655,109.834 135.144,114.324 J4.15@135.144,116.967
OV_D7: J4.16 U21.105 | length 13.7
  Bottom Layer w0.152: U21.105@128.207,111.115 128.207,109.98 129.069,109.118 130.177,109.118 130.588,109.529 130.781,109.529 135.644,114.393 J4.16@135.644,116.967
OV_HREF: J4.6 U21.80 | length 19.2
  Bottom Layer w0.152: U21.80@115.707,111.115 115.707,113.294 117.551,115.138 129.698,115.138 130.644,116.084 J4.6@130.644,116.967
OV_PCLK: J4.7 U21.83 | length 17.5
  Bottom Layer w0.152: U21.83@117.207,111.115 117.207,112.127 119.913,114.833 129.893,114.833 131.144,116.084 J4.7@131.144,116.967
OV_PWDN: J4.8 U21.84 | length 17.5
  Bottom Layer w0.152: U21.84@117.707,111.115 117.707,112.119 120.117,114.529 130.073,114.529 131.644,116.1 J4.8@131.644,116.967
OV_RESET: J4.3 U21.76 | length 19.1
  Bottom Layer w0.152: U21.76@113.707,111.115 113.707,112.614 116.841,115.748 128.575,115.748 129.144,116.317 J4.3@129.144,116.967
OV_SCL: J4.17 U21.101 | length 17.3
  Bottom Layer w0.152: U21.101@126.207,111.115 126.086,110.994 126.086,108.999 126.398,108.687 130.176,108.687 130.714,109.225 130.907,109.225 136.144,114.462 J4.17@136.144,116.967
OV_SDA: J4.18 U21.100 | length 18.3
  Bottom Layer w0.152: U21.100@125.707,111.115 125.707,108.947 126.272,108.382 130.303,108.382 130.841,108.92 131.033,108.92 136.644,114.531 J4.18@136.644,116.967
OV_VSYNC: J4.4 U21.77 | length 19.3
  Bottom Layer w0.152: U21.77@114.207,111.115 114.207,112.683 116.967,115.443 129.003,115.443 129.644,116.084 J4.4@129.644,116.967
POWIO_Cur: J1.4 R38.1 R40.2 | length 4.8
  Top Layer w0.152: J1.4@73.152,120.523 v2(73.152,123.571)
  Bottom Layer w0.152: R38.1@81.28,106.172 81.288,106.18 R40.2@81.288,107.125 81.288,107.942 v2(81.28,107.95)
POWIO_Vol: J1.3 R39.1 R41.2 | length 4.7
  Top Layer w0.152: v2(73.152,114.046) J1.3@73.152,116.923
  Bottom Layer w0.152: R39.1@80.227,106.172 R41.2@80.227,107.125 80.227,107.913 v2(80.264,107.95)
PPM_INPUT: R48.2 U5.29 U18.2 | length 28.1
  Top Layer w0.152: v1(67.691,93.218) v1(67.691,103.251) ; v1(73.914,93.091) 74.422,92.583 74.422,91.694 U5.29@74.375,91.647
  Bottom Layer w0.152: 67.056,111.895 67.056,110.363 66.167,109.474 66.167,107.442 66.929,106.68 67.26,106.68 68.072,105.868 68.072,104.727 68.087,104.712 68.087,103.647 v1(67.691,103.251) ; v1(67.691,93.218) 67.716,93.193 73.812,93.193 v1(73.914,93.091)
RED: P7.1 RN2.2 RN2.3 RN2.4 RN3.4 RN3.8 RN4.8 | length 35.9
  Bottom Layer w0.152: RN3.8@139.534,104.242 139.757,104.242 140.415,103.585 140.415,102.578 141.151,101.842 RN3.4@141.392,101.842 142.092,101.842 142.511,102.261 RN4.8@143.383,102.261 143.602,102.261 RN2.4@145.241,103.9 ; P7.1@144.129,79.935 144.129,80.817 144.973,81.661 145.642,81.661 146.853,82.872 146.853,102.288 RN2.4@145.241,103.9 ; RN2.2@145.241,105.5 RN2.3@145.241,104.7 RN2.4@145.241,103.9
RSSI_IN: R49.1 U5.15 U5.33 | length 27.9
  Top Layer w0.152: v1(65.913,110.871) 65.913,110.823 71.501,105.236 71.501,99.568 72.167,98.902 ; U5.15@70.875,97.647 71.612,97.647 72.167,98.202 72.167,98.902 ; U5.33@76.375,91.647 76.375,92.527 75.278,93.624 74.143,93.624 73.279,94.488 73.279,98.552 73.271,98.56 73.271,98.59 72.958,98.902 72.167,98.902
  Bottom Layer w0.152: v1(65.913,110.871) 65.913,111.895
SAFETY: J1.10 R5.2 S1.1 U5.41 | length 17.4
  Top Layer w0.152: J1.10@76.962,120.523 v2(76.962,123.571) ; U5.41@79.375,95.147 81.431,95.147 82.542,96.258 R5.2@82.542,102.997 82.542,104.228 S1.1@84.486,106.172
SBUS_INPUT: U5.22 U18.6 | length 17.3
  Top Layer w0.152: v1(68.834,101.6) 68.834,95.33 70.017,94.147 U5.22@70.875,94.147
  Bottom Layer w0.152: 67.437,108.712 67.437,107.841 69.85,105.428 69.85,102.616 v1(68.834,101.6)
SBUS_OUTPUT: U5.21 U18.5 | length 16.5
  Top Layer w0.152: v1(69.342,103.124) 69.342,95.377 70.072,94.647 U5.21@70.875,94.647
  Bottom Layer w0.152: 66.787,108.712 66.787,107.584 67.945,106.426 68.421,106.426 69.342,105.505 v1(69.342,103.124)
SBUS_OUTPUT_EN: U5.40 | length 29.7
  Top Layer w0.152: U5.40@79.375,94.647 81.362,94.647 83.185,96.47 v1(83.185,100.838)
  Bottom Layer w0.152: 68.087,108.712 68.087,107.681 70.155,105.613 70.155,102.49 71.807,100.838 v1(83.185,100.838)
SDIO_CK: P4.5 U11.80 | length 34
  Top Layer w0.152: v1(98.679,103.505) 98.679,106.045 102.514,109.88 119.99,109.88 120.941,108.929 P4.5@120.941,105.978 ; v1(100.965,103.505) 100.965,101.663 U11.80@101.028,101.6
  Bottom Layer w0.152: v1(98.679,103.505) v1(100.965,103.505)
SDIO_CMD: P4.3 R54.1 U11.83 | length 28
  Top Layer w0.152: U11.83@99.528,101.6 99.528,104.481 104.318,109.271 116.408,109.271 118.741,106.938 P4.3@118.741,105.978 118.741,104.085 R54.1@118.791,104.035
SDIO_D0: P4.7 R53.1 U11.65 | length 50.2
  Top Layer w0.152: v1(97.663,103.505) 97.561,103.607 97.561,105.512 102.234,110.185 121.082,110.185 123.141,108.126 P4.7@123.141,105.978 123.141,104.092 R53.1@123.198,104.035 ; v1(97.79,94.869) U11.65@104.759,94.869 ; U11.65@104.775,94.869 U11.65@104.759,94.869 ; U11.65@104.778,94.85 U11.65@104.759,94.869
  Bottom Layer w0.152: v1(97.663,103.505) 97.663,94.996 v1(97.79,94.869)
SDIO_D1: P4.8 R52.1 U11.66 | length 52.4
  Top Layer w0.152: v1(96.774,95.758) 102.489,95.758 102.897,95.35 U11.66@104.778,95.35 ; v1(96.774,104.013) 96.774,105.156 102.108,110.49 122.047,110.49 124.241,108.296 P4.8@124.241,105.978 124.241,104.046 R52.1@124.252,104.035
  Bottom Layer w0.152: v1(96.774,95.758) 96.799,95.783 96.799,103.988 v1(96.774,104.013)
SDIO_D2: P4.1 R56.1 U11.78 | length 18.8
  Top Layer w0.152: U11.78@102.028,101.6 102.028,102.409 104.902,105.283 115.846,105.283 P4.1@116.541,105.978 116.541,104.088 R56.1@116.594,104.035
SDIO_D3: P4.2 R55.1 U11.79 | length 24.3
  Top Layer w0.152: U11.79@101.528,101.6 101.528,103.687 106.807,108.966 115.951,108.966 117.641,107.276 P4.2@117.641,105.978 117.641,104.042 R55.1@117.648,104.035
SERIAL_FMU_TO_IO: R16.2 U11.63 | length 42.7
  Top Layer w0.152: R16.2@70.866,102.451 v1(70.866,103.632) ; v1(90.678,93.719) 90.787,93.828 104.756,93.828 U11.63@104.778,93.85
  Bottom Layer w0.152: v1(70.866,103.632) 71.374,103.124 87.099,103.124 88.646,101.577 88.646,95.751 v1(90.678,93.719)
SERIAL_IO_TO_FMU: R15.2 U11.64 | length 40.8
  Top Layer w0.152: R15.2@72.327,102.451 72.263,102.515 72.415,102.668 v1(72.415,103.607) ; v1(90.678,94.481) 91.027,94.132 101.745,94.132 101.962,94.35 U11.64@104.778,94.35
  Bottom Layer w0.152: v1(72.415,103.607) 87.047,103.607 89.408,101.246 89.408,95.751 v1(90.678,94.481)
SPI_EXT_MISO: J1.12 U11.4 | length 5.5
  Top Layer w0.152: J1.12@78.232,120.523 v2(78.232,123.571) ; v1(86.868,98.552) 86.97,98.45 89.178,98.45 U11.4@89.278,98.35
SPI_EXT_MOSI: J1.17 U11.5 | length 5.5
  Top Layer w0.152: v2(82.042,114.046) J1.17@82.042,116.923 ; v1(86.741,97.79) 89.084,97.79 89.211,97.917 U11.5@89.278,97.85
SPI_EXT_NSS: J1.18 U11.3 | length 6
  Top Layer w0.152: J1.18@82.042,120.523 v2(82.042,123.571) ; v1(86.614,99.568) 87.122,99.568 87.807,98.883 89.245,98.883 U11.3@89.278,98.85
SPI_EXT_SCK: J1.11 U11.1 | length 17.9
  Top Layer w0.152: v2(78.232,114.046) J1.11@78.232,116.923 ; U11.1@89.278,99.85 87.983,99.85 86.157,101.676 86.157,107.747 86.868,108.458 88.392,108.458 90.17,110.236
SPI_INT_MISO: U11.31 U13.4 U14.9 U15.6 U16.7 U21.42 | length 72
  Top Layer w0.152: U11.31@93.528,86.1 v1(93.528,92.583) ; v1(114.554,94.361) 118.681,94.361 U15.6@119.336,95.016 119.399,94.953 U13.4@121.626,94.953 v1(121.626,93.845) ; v1(128.841,91.662) 128.841,90.242 U14.9@128.877,90.206 ; U16.7@129.092,96.993 129.095,96.99 v1(129.095,95.218)
  ground_plane w0.152: v1(93.528,92.583) 94.488,92.583 95.91,94.005 112.851,94.005 113.207,94.361 v1(114.554,94.361)
  Bottom Layer w0.152: 95.083,87.376 97.028,87.376 98.781,89.129 98.781,93.066 100.33,94.615 106.399,94.615 107.399,93.615 U21.42@109.707,93.615 ; v1(121.626,93.845) 127.722,93.845 v1(129.095,95.218) 129.095,91.916 v1(128.841,91.662)
SPI_INT_MOSI: U11.32 U13.3 U14.24 U15.7 U16.6 U21.39 | length 45.5
  Top Layer w0.152: U11.32@94.028,86.1 94.028,93.139 v1(94.234,93.345) ; v1(114.427,95.631) 118.701,95.631 U15.7@119.336,96.266 119.336,96.218 119.951,95.603 U13.3@121.626,95.603 122.995,95.603 v1(122.999,95.599) ; U14.24@127.877,94.206 127.774,94.309 127.774,94.892 v1(127.063,95.603) 128.453,96.993 U16.6@128.592,96.993
  ground_plane w0.152: v1(94.234,93.345) 95.199,94.31 112.725,94.31 114.046,95.631 v1(114.427,95.631)
  Bottom Layer w0.152: v1(122.999,95.599) 127.059,95.599 v1(127.063,95.603)
SPI_INT_SCK: U11.30 U13.2 U14.23 U15.8 U16.4 U21.38 | length 50.3
  Top Layer w0.152: U11.30@93.028,86.1 v1(93.028,87.503) ; v1(111.506,95.631) 112.014,95.631 113.284,96.901 118.721,96.901 U15.8@119.336,97.516 119.781,97.516 121.044,96.253 U13.2@121.626,96.253 122.764,96.253 v1(123.126,96.615) ; v1(126.301,97.885) 127.7,97.885 U16.4@127.692,97.893 ; v1(128.333,95.853) 128.333,94.25 U14.23@128.377,94.206
  ground_plane w0.152: v1(93.091,94.615) 96.824,94.615 97.561,95.352 105.435,95.352 105.639,95.148 111.023,95.148 v1(111.506,95.631)
  Bottom Layer w0.152: v1(93.028,87.503) 93.028,94.552 v1(93.091,94.615) ; v1(123.126,96.615) 124.396,97.885 v1(126.301,97.885) v1(128.333,95.853)
STP: U21.68 U25.13
TCK: P5.8 R68.2 U21.16 | length 11.7
  Top Layer w0.152: R68.2@121.412,79.113 122.301,80.002 v1(122.301,81.661)
  Bottom Layer w0.152: U21.16@122.207,88.615 122.174,88.582 122.174,81.788 v1(122.301,81.661) 122.293,81.653 P5.8@122.293,79.883
TDI: P5.7 R67.2 U21.15 | length 12.7
  Top Layer w0.152: R67.2@122.365,79.113 122.851,79.599 v1(122.851,82.804)
  Bottom Layer w0.152: U21.15@122.707,88.615 122.707,82.948 v1(122.851,82.804) 122.851,82.592 122.834,82.575 122.834,79.924 P5.7@122.793,79.883
TDO: P5.10 U21.20 | length 9.2
  Bottom Layer w0.152: U21.20@120.207,88.615 120.207,82.866 121.293,81.78 P5.10@121.293,79.883
TMS: P5.9 R69.2 U21.18 | length 13.3
  Top Layer w0.152: R69.2@120.46,79.113 121.348,80.001 121.348,82.838 v1(121.539,83.029)
  Bottom Layer w0.152: U21.18@121.207,88.615 121.207,83.361 v1(121.539,83.029) 121.793,82.775 P5.9@121.793,79.883
USB_N: J5.2 U25.8
USB_P: J5.3 U25.7
USB_VDD_3.3: C77.2 C78.2 U25.6 U25.16 U25.25 U25.30 U25.31 Y4.1 Y4.4
VBUS: C64.1 C79.1 D3.2 J3.1 J5.1 R1.1 U11.68 U19.5 U26.6 U26.8 | length 54.8
  Top Layer w0.152: U11.68@104.778,96.35 105.326,96.35 106.045,95.631 v1(107.061,95.631) ; v1(107.061,85.217) 123.384,85.217 124.112,84.488 135.242,84.488 135.295,84.542 ; J3.1@137.115,81.534 137.115,82.722 v1(136.906,82.931) 135.295,84.542 ; U19.5@138.446,84.582 138.446,85.305 ; C64.1@141.774,83.279 140.865,83.279 140.103,84.041 140.103,85.184 139.722,85.565 138.706,85.565 138.446,85.305 ; 135.295,84.542 136.352,85.598 138.153,85.598 138.446,85.305
  source w0.152: v1(107.061,85.217) v1(107.061,95.631)
VBUS_VALID: U11.15 | length 52.6
  Top Layer w0.152: U11.15@89.278,92.85 89.291,92.837 v1(90.678,92.837) ; v1(137.033,92.202) 137.054,92.181 138.311,92.181 138.311,90.405 138.338,90.378
  ground_plane w0.152: v1(90.678,92.837) 92.329,92.837 93.218,91.948 95.758,91.948 96.52,92.71 97.282,92.71 98.196,91.796 109.322,91.796 110.363,92.837 128.651,92.837 129.286,92.202 v1(137.033,92.202)
VDD_3V3_SENSORS: C8.1 C10.2 C49.2 C50.2 C54.2 C55.2 C56.2 C57.2 C58.2 Rs1.2 U4.5 U13.1 U13.15 U13.16 U14.13 U15.1 U16.1 U16.14 | length 47.3
  Top Layer w0.152: C50.2@115.588,97.544 117.108,97.544 U15.1@117.136,97.516 117.582,97.516 118.237,98.171 v1(120.269,98.171) 121.537,96.903 U13.1@121.626,96.903 U13.16@122.481,97.758 ; C58.2@120.94,99.056 C56.2@121.907,99.056 C55.2@122.875,99.056 ; U13.16@122.476,97.758 U13.16@122.481,97.758 ; v1(123.19,90.551) 123.158,90.551 122.11,89.503 U4.5@122.118,89.495 123.322,89.495 C10.2@123.33,89.487 C8.1@124.298,89.487 Rs1.2@125.309,89.487 ; v1(129.889,91.186) 130.079,91.186 130.309,90.956 U14.13@131.127,90.956 131.151,90.932 C49.2@132.239,90.932 ; C57.2@130.056,100.961 129.592,100.497 U16.14@129.592,99.793 129.592,99.271 129.349,99.028 128.46,99.028 128.095,99.393 U16.1@127.692,99.393 127.692,100.532 C54.2@128.122,100.961 127.514,101.568 125.387,101.568 C55.2@122.875,99.056 ; U13.16@122.481,97.758 U13.15@123.126,97.758 123.126,98.805 C55.2@122.875,99.056
  source w0.152: v1(120.269,98.171) 120.269,93.472 v1(123.19,90.551) 129.254,90.551 v1(129.889,91.186)
VDD_3V3_SENSORS_EN: U11.2 | length 44.3
  Top Layer w0.152: U11.2@89.278,99.35 89.339,99.289 102.464,99.289 104.14,100.965 114.3,100.965 115.189,100.076 v1(116.205,100.076) ; v1(116.205,90.297) 116.205,88.773 117.383,87.595 119.528,87.595 119.528,86.674 119.713,86.489
  Bottom Layer w0.152: v1(116.205,90.297) v1(116.205,100.076)
VDD_5V_BRICK: C45.1 D2.2 J1.36 | length 75.4
  Top Layer w0.152: J1.36@93.472,120.523 v2(93.472,123.571) ; v2(142.621,82.169) 142.684,82.232 142.684,83.279
  ground_plane w0.152: 108.941,119.99 123.85,119.99 126.492,117.348 v2(143.383,117.348)
  source w0.152: v2(142.621,82.169) 142.621,88.392 143.637,89.408 143.637,117.094 v2(143.383,117.348)
VDD_5V_HIPOWER: C6.2 C9.2 C67.1 C72.2 C75.2 D2.1 D3.1 DS2.1 DS3.1 DS4.1 DS5.1 J1.5 J1.6 J2.2 R13.1 U3.1 U3.3 U4.1 U4.3 U8.4 U23.1 U23.3 U24.1 U24.3 | length 201.1
  Top Layer w0.152: v1(66.903,76.708) DS3.1@66.903,78.321 ; v1(71.552,76.708) DS5.1@71.552,78.321 ; v1(73.102,76.708) DS4.1@73.102,78.321 ; v2(74.422,114.046) J1.5@74.422,116.923 ; J1.6@74.422,120.523 v2(74.422,123.571) ; 82.55,85.344 86.995,85.344 v1(87.122,85.471) ; v1(92.456,78.994) R13.1@92.456,82.939 ; DS2.1@106.718,76.962 107.226,76.454 v1(110.49,76.454) ; v1(110.49,82.804) 110.151,82.465 110.151,81.661 110.801,81.661 U8.4@111.555,80.907 ; C9.2@117.729,89.527 119.496,89.527 U4.1@119.528,89.495 ; v1(118.872,90.424) 119.528,89.768 U4.1@119.528,89.495 ; 120.713,86.489 120.713,88.995 120.213,89.495 U4.1@119.528,89.495 ; v1(133.477,87.376) 133.63,87.376 135.242,88.988
  ground_plane w0.152: v1(66.903,76.708) 67.792,77.597 70.663,77.597 v1(71.552,76.708) v1(73.102,76.708) v1(92.456,76.708) 110.236,76.708 v1(110.49,76.454) ; v1(108.077,107.823) v1(118.872,107.823) ; v1(109.273,113.411) v1(112.268,113.411)
  source w0.152: v1(87.122,85.471) 87.122,84.328 v1(92.456,78.994) v1(92.456,76.708) ; v1(108.077,107.823) 108.077,108.331 109.273,109.527 v1(109.273,113.411) ; v1(110.49,76.454) v1(110.49,82.804) 117.221,82.804 118.872,84.455 v1(118.872,90.424) ; v1(118.872,107.823) v1(118.872,90.424) ; v1(133.477,87.376) 121.92,87.376 v1(118.872,90.424)
  Bottom Layer w0.152: C6.2@59.944,123.294 61.326,123.294 v2(61.349,123.317) ; v1(99.314,110.49) 99.314,109.54 U3.1@100.269,108.585 ; C72.2@100.277,110.059 100.269,110.051 U3.1@100.269,108.585 ; 103.124,112.812 103.124,111.448 C75.2@104.463,110.109 104.521,110.051 U24.1@104.521,108.585 ; U23.3@107.381,115.951 107.381,116.652 107.95,117.221 v1(108.839,117.221) 109.281,116.779 U23.1@109.281,115.951 109.281,114.358 109.273,114.35 v1(109.273,113.411) ; v1(108.077,107.823) 107.183,107.823 U24.3@106.421,108.585 106.421,108.072 105.918,107.569 104.902,107.569 104.521,107.95 U24.1@104.521,108.585 ; v1(112.268,113.411) 112.268,115.896 112.273,115.901 112.273,116.591 112.776,117.094 113.665,117.094 114.173,116.586 114.173,114.319 114.104,114.25 ; U3.1@100.269,108.585 100.269,107.884 100.584,107.569 101.854,107.569 102.169,107.884 U3.3@102.169,108.585 U24.1@104.521,108.585
VDD_5V_PERIPH_EN: U11.67
VDD_5V_SENS: R13.2 R14.1 U11.29 | length 3.1
  Top Layer w0.152: R14.1@91.503,83.939 R13.2@92.456,83.939 92.528,84.011 U11.29@92.528,86.1
VDD_BRICK_VALID: U11.91 | length 67.7
  Top Layer w0.152: v2(95.504,100.33) 95.528,100.354 U11.91@95.528,101.6 ; v1@137.312,103.353 140.688,99.977 140.688,89.428 141.994,88.122 141.994,87.333 140.728,87.333 140.23,86.835 140.23,85.967 140.865,85.332 140.865,84.279
  ground_plane w0.152: v2(95.504,100.33) 95.529,100.355 110.134,100.355 113.919,104.14 126.619,104.14 127.381,103.378 v1(137.287,103.378)
VDD_SERVO_SENS: U5.14
VDD_SERVO_VALID: U11.93 | length 3.3
  Top Layer w0.152: U11.93@94.528,101.6 94.528,102.322 v1(95.377,103.171)
  Bottom Layer w0.152: v1(95.377,103.171) 95.438,103.232 95.438,104.529
VGA_HSYNC: P7.4 U21.143 | length 17
  Bottom Layer w0.152: U21.143@132.207,91.615 133.606,91.615 135.56,89.661 135.56,87.756 140.893,82.423 141.274,82.423 142.629,81.068 P7.4@142.629,79.935
VGA_VSYNC: P7.5 U21.144 | length 16.4
  Bottom Layer w0.152: U21.144@132.207,91.115 133.675,91.115 135.255,89.535 135.255,87.63 140.97,81.915 141.351,81.915 142.129,81.137 P7.5@142.129,79.935
VGAD0: RN12.5 U21.142 | length 15.9
  Bottom Layer w0.152: U21.142@132.207,92.115 133.741,92.115 135.865,89.991 135.865,87.883 140.041,83.706 RN12.5@143.383,83.706
VGAD1: RN11.7 U21.138 | length 11.5
  Bottom Layer w0.152: U21.138@132.207,94.115 133.342,94.115 136.652,90.805 136.652,88.519 137.884,87.287 RN11.7@139.534,87.287